# Altium PCB amino.PcbDoc (part 1 of 2)
Units mm, origin at the board's own origin, x right, y up, seen from the top; angles counter-clockwise.
Board outline 13 x 15 mm, 6 copper layers (L1 - SIG, L2 - GND, L3 - SIG, L4 - SIG, L5 - PWR, L6 - SIG), stack 0.739 mm thick; 51 components, 70 nets, 305 pads, 81 vias.
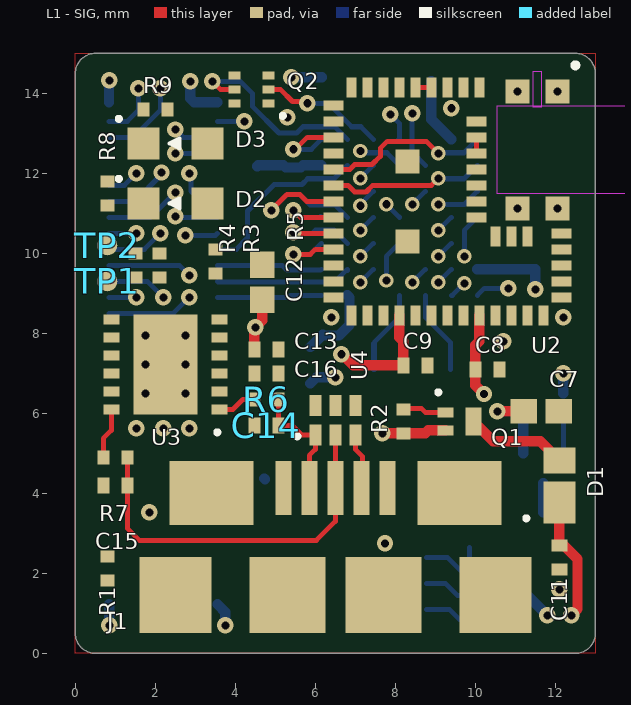
[diagram p0: L1 - SIG view]
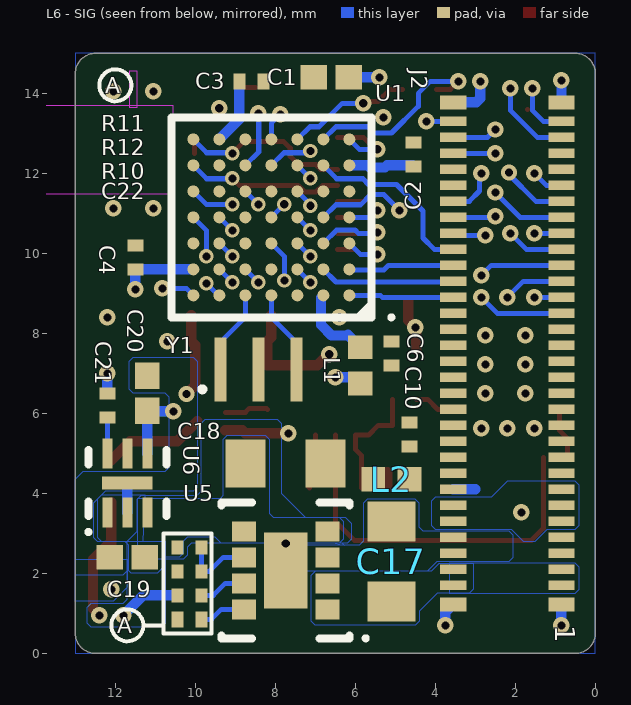
[diagram p1: L6 - SIG view, seen from below]
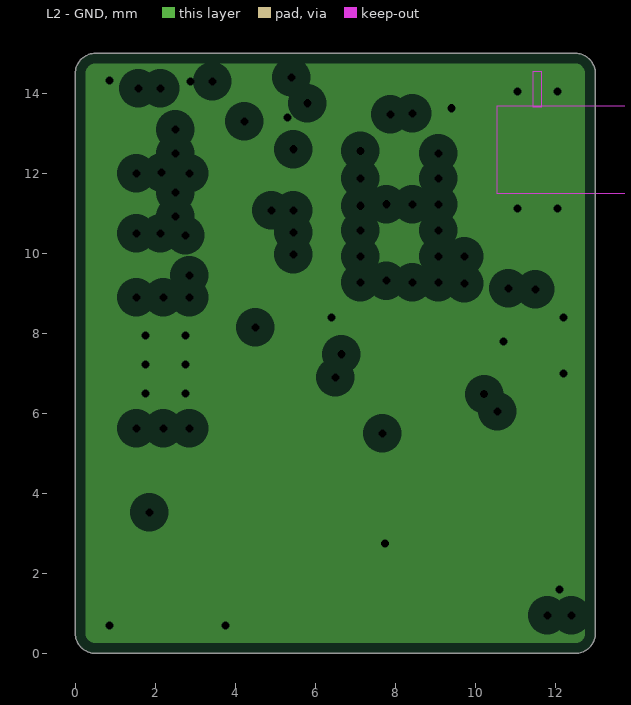
[diagram p2: L2 - GND, clearances drawn from the general rule]
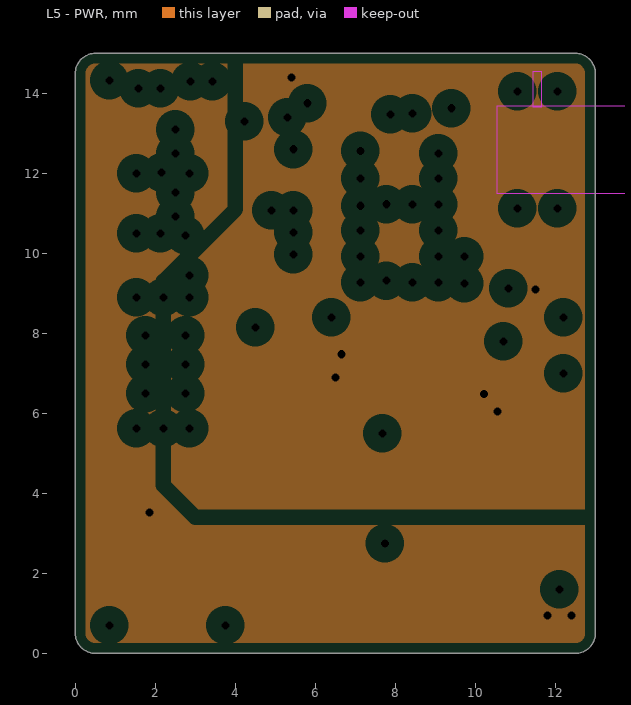
[diagram p3: L5 - PWR, clearances drawn from the general rule]
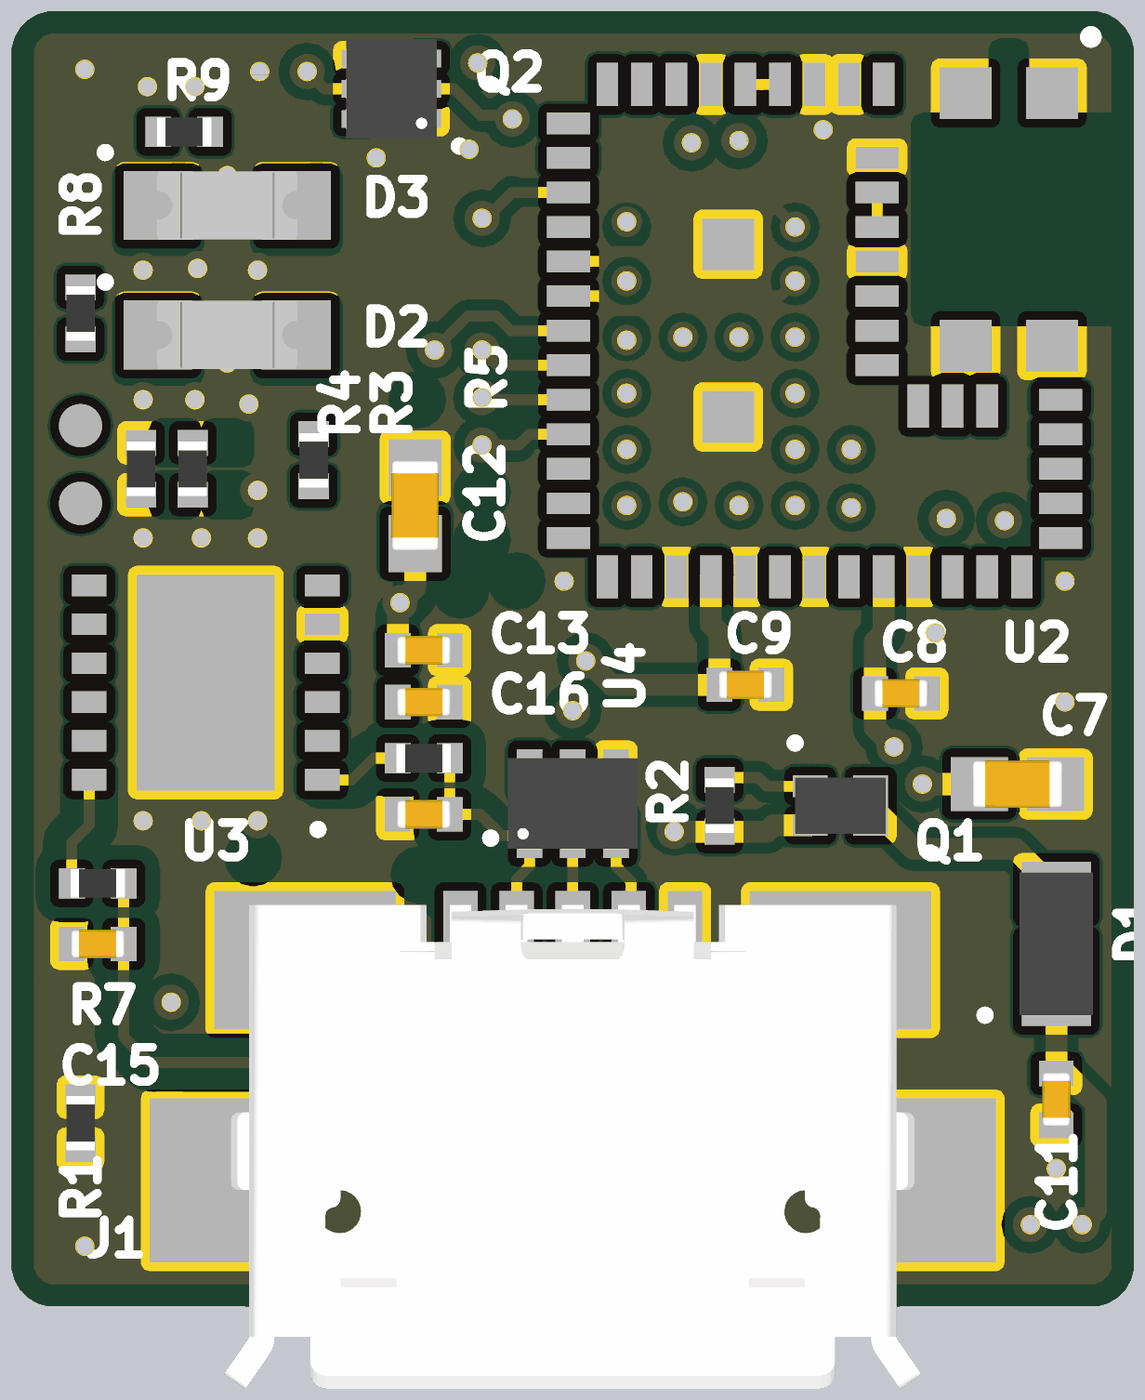
[diagram p4: 3D render of the assembled board from above, using the file's embedded part models]
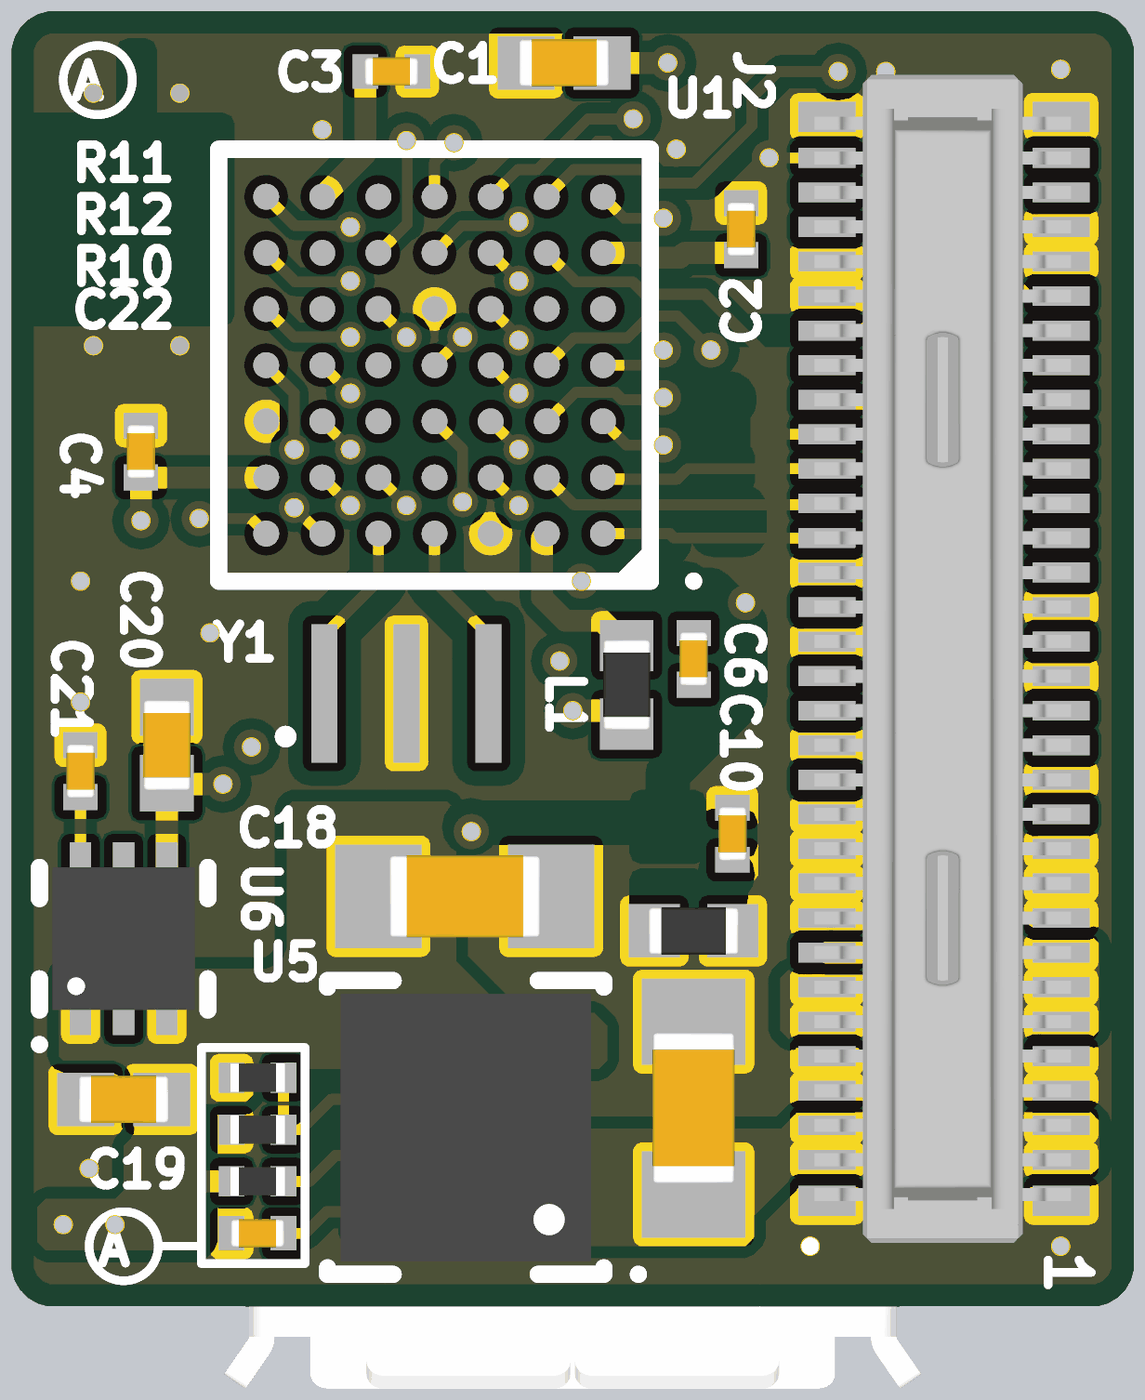
[diagram p5: 3D render of the assembled board from below, using the file's embedded part models]

## Layer stack, top to bottom
Top Solder: solder mask 0.0127, Solder Resist, Dk 3.5
L1 - SIG: signal copper 0.0356
Dielectric: core 0.0889, FR-4, Dk 4.15
L2 - GND: plane copper 0.0178, net GND
Dielectric: core 0.1016, FR-4, Dk 4.15
L3 - SIG: signal copper 0.0178
Dielectric: core 0.2159, FR-4, Dk 4.15
L4 - SIG: signal copper 0.0178
Dielectric: core 0.1016, FR-4, Dk 4.15
L5 - PWR: plane copper 0.0178, net (Multiple Nets)
Dielectric: core 0.0889, FR-4, Dk 4.15
L6 - SIG: signal copper 0.0356
Bottom Solder: solder mask 0.0127, Solder Resist, Dk 3.5

## Board outline
0,14.5 cw(c0.5,14.5) 0.5,15 12.5,15 cw(c12.5,14.5) 13,14.5 13,0.5 cw(c12.5,0.5) 12.5,0 0.5,0 cw(c0.5,0.5) 0,0.5

## Design rules (kind name [scope] priority, off if disabled: settings)
AcuteAngle [All] p1: minimum=6.00000000000000E+0001 checktracksonly=TRUE
BoardOutlineClearance [All] p1: gap=0.254 ignorepadtopadclearanceinfootprint=FALSE
Clearance BGA_1 [WithinRoom('BGA')] p1: gap=0.102 ignorepadtopadclearanceinfootprint=FALSE
Clearance "USB 3H" [InDifferentialPairClass('USB') And Not InComponent('J1', 'J2', 'U3', 'U4') And Not WithinRoom('BGA')] p2: gap=0.267 ignorepadtopadclearanceinfootprint=FALSE
Clearance "Clocks 3H" [InNetClass('Clocks') And Not InComponent('J2', 'U2') And Not WithinRoom('BGA')] p3: gap=0.267 ignorepadtopadclearanceinfootprint=FALSE
Clearance "JTAG 3H Inners" [InNetClass('JTAG') And OnMid] p4: gap=0.305 ignorepadtopadclearanceinfootprint=FALSE
Clearance "JTAG 3H Outers" [InNetClass('JTAG') And OnOutside And Not InComponent('J2', 'U2') And Not WithinRoom('BGA')] p5: gap=0.267 ignorepadtopadclearanceinfootprint=FALSE
Clearance "Default Clearance" [All] p6: gap=0.127 ignorepadtopadclearanceinfootprint=FALSE
ComponentClearance Testpoints [InComponentClass('Testpoints')] p1: gap=0.127 collisioncheckmode=3 verticalgap=0.127 showdistances=FALSE
ComponentClearance "Chip to Chip" [InComponentClass('Chip') vs InComponentClass('Chip')] p2: gap=0.254 collisioncheckmode=3 verticalgap=0.127 showdistances=FALSE
ComponentClearance "All Others" [All] p3: gap=0.635 collisioncheckmode=3 verticalgap=0.127 showdistances=FALSE
DiffPairsRouting USB [InDifferentialPairClass('USB')] p1: maxlimit=0.152 minlimit=0.152 mostfreqgap=0.152 toplayer_minwidth=0.127 toplayer_maxwidth=0.127 toplayer_prefwidth=0.127 midlayer1_minwidth=0.127 midlayer1_maxwidth=0.127 midlayer1_prefwidth=0.127 midlayer2_minwidth=0.127 midlayer2_maxwidth=0.127 midlayer2_prefwidth=0.127 bottomlayer_minwidth=0.127 bottomlayer_maxwidth=0.127 bottomlayer_prefwidth=0.127 maxuncoupledlength=12.7
Height "Bottom Max Height" [OnBottom] p1: minheight=0 maxheight=2 prefheight=1.5
Height "Top Max Height" [OnTop] p2: minheight=0 maxheight=3 prefheight=1
HoleToHoleClearance [All] p1: gap=0.127 allowstackedmicrovias=TRUE
Length "Clocks 19mm" [InNetClass('Clocks')] p1: maxlimit=19 minlimit=0
Length "JTAG 100mm" [InNetClass('JTAG')] p2: maxlimit=100 minlimit=0
MatchedLengths "Clocks 0.127mm" [InNetClass('Clocks')] p1: tolerance=0.127 checknetsindiffpair=FALSE checkdiffpairvsdiffpair=TRUE checkxsignals=TRUE checkothers=TRUE
MatchedLengths "USB 3.81mm" [InDifferentialPairClass('USB')] p2: tolerance=3.81 checknetsindiffpair=TRUE checkdiffpairvsdiffpair=FALSE checkxsignals=FALSE checkothers=FALSE
MaxMinImpedance "90ohm DIFF" [InDifferentialPairClass('USB')] p1: minimum=81.00 maximum=99.00
MaxMinImpedance "50ohm SE" [InNetClass('Clocks', 'JTAG')] p2: minimum=45.00 maximum=55.00
MaximumViaCount "USB 1 Via" [InDifferentialPairClass('USB')] p1: limit=1
MinimumAnnularRing "BGA AR" [WithinRoom('BGA')] p1: minimumring=0.076
MinimumAnnularRing [All] p2: minimumring=0.102
MinimumSolderMaskSliver [All] p1: minsoldermaskwidth=0.001
PlaneClearance [All] p1: clearance=0.381
PlaneConnect [All] p1: planeconnectstyle=Direct reliefexpansion=0.508 reliefentries=4 reliefconductorwidth=0.254 reliefairgap=0.254
PolygonConnect [All] p1: connectstyle=Direct reliefconductorwidth=0.254 reliefentries=4 polygonreliefangle="90 Angle" airgapwidth=0.254
RoomDefinition BGA [All] p1: confinementstyle=ConfineOut formatcopy=TRUE lockcomponents=FALSE outline 5.75,13.25 10.5,13.25 10.5,8.5 5.75,8.5
RoutingCorners [All] p1: cornerstyle=45-Degree minsetback=0.254 maxsetback=0.254
RoutingLayers "Clocks and USB" [InNetClass('Clocks','USB')] p1: top layer_v5=TRUE mid layer 1_v5=FALSE mid layer 2_v5=FALSE bottom layer_v5=TRUE
RoutingLayers "Default Routing" [All] p2: top layer_v5=TRUE mid layer 1_v5=TRUE mid layer 2_v5=TRUE bottom layer_v5=TRUE
RoutingVias [All] p1: holewidth=0.203 width=0.457 viastyle="Through Hole" minholewidth=0.203 minwidth=0.406 maxholewidth=100 maxwidth=200
SMDEntry [All] p1: side=TRUE corner=TRUE anyangle=TRUE
SilkToSilkClearance [All] p1: silktosilkclearance=0.127
SilkToSolderMaskClearance [IsPad] p1: minsilkscreentomaskgap=0.127 clearancetoexposedcopper=TRUE
SolderMaskExpansion [All] p1: expansion=0.102
ViasUnderSMD [All] p1: allowed=FALSE
Width "Teensy Power" [InNetClass('Teensy Power')] p1: maxlimit=100 minlimit=0.254 preferedwidth=0.254
Width "Low Power" [InNetClass('Low Power')] p2: maxlimit=100 minlimit=0.254 preferedwidth=0.635
Width "Medium Power" [InNetClass('Medium Power')] p3: maxlimit=100 minlimit=0.254 preferedwidth=1.778
Width "High Power" [InNetClass('High Power')] p4: maxlimit=100 minlimit=0.254 preferedwidth=4.064
Width "Clocks 50ohm" [InNetClass('Clocks')] p5: maxlimit=0.13 minlimit=0.082 preferedwidth=0.11 toplayer_maxwidth=0.127 toplayer_prefwidth=0.103 midlayer1_minwidth=0.093 midlayer2_minwidth=0.093 bottomlayer_maxwidth=0.127 bottomlayer_prefwidth=0.103 impedancedriven=TRUE minimp=45.000000 maximp=55.000000 favimp=50.000000
Width "JTAG 50ohm" [InNetClass('JTAG')] p6: maxlimit=0.13 minlimit=0.082 preferedwidth=0.11 toplayer_maxwidth=0.127 toplayer_prefwidth=0.103 midlayer1_minwidth=0.093 midlayer2_minwidth=0.093 bottomlayer_maxwidth=0.127 bottomlayer_prefwidth=0.103 impedancedriven=TRUE minimp=45.000000 maximp=55.000000 favimp=50.000000
Width "Default Width" [All] p7: maxlimit=100 minlimit=0.127 preferedwidth=0.203
19 further rules are at their usual default settings.

## Classes and differential pairs
component class Testpoints: TP1 TP2
component class Chip: C1 C2 C3 C4 C6 C7 C8 C9 C10 C11 C12 C13 C14 C15 C16 C17 C18 C19 C20 C21 C22 D2 D3 L1 L2 R1 R2 R3 R4 R5 R6 R7 R8 R9 R10 R11 R12
differential pair class USB: MCU_D USB_D USB_DR
net class "Teensy Power": AVCC VCCIO
net class "Low Power": 3V3 5V0_USB VBUS
net class "Medium Power": 12V0
net class "High Power": 5V0 GND
net class Clocks: HFXO XTALI XTALO
net class USB: MCU_D_N MCU_D_P USB_D_N USB_D_P USB_DR_N USB_DR_P
net class JTAG: BT_SWCLK BT_SWDIO BT_SWO PDI_CLK PDI_DATA
differential pair USB_D: +USB_D_P -USB_D_N
differential pair USB_DR: +USB_DR_P -USB_DR_N
differential pair MCU_D: +MCU_D_P -MCU_D_N

## Components (designator, comment, footprint, x,y, rotation, side; value= is the part's Value field where it differs from the comment)
C1 "10uF" C0402 6.6,14.4 r180 bottom
C2 "0.1uF" C0201 4.55,12.475 r270 bottom
C3 "0.1uF" C0201 8.6,14.3 r0 bottom
C4 "0.1uF" C0201 11.5,9.9 r270 bottom
C6 "0.1uF" C0201 5.1,7.5 r90 bottom
C7 "10uF" C0402 11.65,6.05 r180 top
C8 "0.1uF" C0201 10.3,7.1 r180 top
C9 "0.1uF" C0201 8.5,7.2 r180 top
C10 "0.1uF" C0201 4.65,5.475 r270 bottom
C11 "0.1uF" C0201 12.1,2.4 r90 top
C12 "4.7uF" C0402 4.675,9.275 r270 top
C13 "0.1uF" C0201 4.775,7.6 r180 top
C14 "47pF" C0201 4.775,5.7 r0 top
C15 "47pF" C0201 1,4.2 r0 top
C16 "0.1uF" C0201 4.775,7 r180 top
C17 "10uF" C0603 5.1,2.3 r270 bottom
C18 "22uF" C0603 7.75,4.75 r0 bottom
C19 "1uF" C0402 11.7,2.4 r180 bottom
C20 "1uF" C0402 11.2,6.5 r270 bottom
C21 "0.1uF" C0201 12.2,6.2 r270 bottom
C22 "3300pF" C0201 10.15,0.85 r180 bottom
D1 "PMEG2020EPK,315" NXP_DFN1608D-2 12.1,4.2 r90 top
D2 "5988091107F" LED0603 2.5,11.25 r0 top
D3 "5988070107F" LED0603 2.5,12.75 r0 top
J1 "ZX62-B-5PA(33)" HRS_MICRO_USB 6.5,2.8 r0 top locked
J2 "DF40C-60DP-0.4V(51)" HRS_DF40C_60P_PLG 2.2,7.5 r90 bottom locked
L1 "BLM15PX601SN1D" L0402 5.875,7.2 r90 bottom
L2 "BLM15PX601SN1D" L0402 5.1,4.35 r0 bottom
Q1 "DMP21D0UFB4-7B" DIO_X2-DFN1006-3 9.6,5.8 r0 top
Q2 "PMDXB600UNE" NXP_DFN1010B-6 4.4,14.1 r180 top
R1 "10k" R0201 0.8,2.125 r270 top
R2 "100k" R0201 8.2,5.8 r270 top
R3 "10k" R0201 2.1,9.7 r90 top
R4 "10k" R0201 1.5,9.7 r90 top
R5 "1k" R0201 3.5,9.8 r270 top
R6 "27" R0201 4.775,6.35 r180 top
R7 "27" R0201 1,4.9 r180 top
R8 "560R" R0201 0.8,11.5 r90 top
R9 "1k" R0201 2,13.6 r180 top
R10 "100k" R0201 10.15,1.45 r0 bottom
R11 "523k" R0201 10.15,2.65 r0 bottom
R12 "100k" R0201 10.15,2.05 r180 bottom
TP1 "TP SMT 0.5MM" TP_SMT_0.5MM 0.8,9.3 r90 top
TP2 "TP SMT 0.5MM" TP_SMT_0.5MM 0.8,10.2 r90 top
U1 "ATXMEGA64A4U-CU" MCP_49C2 8.1,10.9 r0 bottom locked
U2 "BGM123A256V2R" SIL_BGM123 9.3,11.3 r270 top locked
U3 "FT234XD-R" FTD_DFN12 2.25,7.225 r180 top
U4 "TPD4S012DRYR" TI_DRY 6.5,5.825 r90 top
U5 "TPS82140SILT" TI_USIL8_SIL0008D 7.74,2.075 r0 bottom locked
U6 "MIC5353-3.3YMT-TR" MCP_MLF6_MT 11.7,4.26 r90 bottom
Y1 "CSTCE16M0V53-R0" MUR_CSTCE_V 8.425,7.1 r0 bottom

## Footprints (in the part's own frame and the unit in brackets; to place one, negate y for a bottom-side part, rotate by r counter-clockwise, add the part's x,y. Pads: shape width x height; smd on the part's side, far side on the other; paste and mask are expansions set on the pad)
C0201 [mm] "Chip Capacitor, 2-Leads, Body 0.60x0.30mm, IPC Medium Density"
  rect 0.3x0.4 smd: 1(-0.3,0) 2(0.3,0)
  body extent -0.32,-0.17 0.32,0.17, height 0.33
C0402 [mm] "Chip Capacitor, 2-Leads, Body 1.00x0.50mm, IPC Medium Density"
  rect 0.66x0.62 smd: 1(-0.44,0) 2(0.44,0)
  body extent -0.53,-0.28 0.53,0.28, height 0.55
C0603 [mm] "Chip Capacitor, 2-Leads, Body 1.60x0.80mm, IPC Medium Density"
  rect 1x1.2 smd: 1(-1,0) 2(1,0)
  body extent -0.87,-0.48 0.87,0.48, height 0.95
DIO_X2-DFN1006-3 [mm] "DFN, 3-Leads, Body 0.60x1.00mm, Pitch 0.65mm, IPC Medium Density"
  rect 0.4x0.25 smd: 1(-0.35,0.225) 2(-0.35,-0.225)
  rect 0.4x0.7 smd: 3(0.35,0)
  silkscreen extent -0.57,0.68 -0.48,0.77, body extent -0.53,-0.33 0.53,0.33, height 0.4
FTD_DFN12 [mm] "SON, 12-Leads, Body 3x3mm, Pitch 0.45mm, Thermal Pad 2.5x1.6mm"
  rect 0.4x0.25 smd: 1(-1.35,1.125) 2(-1.35,0.675) 3(-1.35,0.225) 4(-1.35,-0.225) 5(-1.35,-0.675) 6(-1.35,-1.125) 7(1.35,-1.125) 8(1.35,-0.675) 9(1.35,-0.225) 10(1.35,0.225) 11(1.35,0.675) 12(1.35,1.125)
  rect 1.6x2.5 smd mask+0.102: 13(0,0)
  silkscreen extent -1.35,1.65 -1.25,1.75, body extent -1.5,-1.5 1.5,1.5, height 0.9
HRS_DF40C_60P_PLG [mm] "60 Position Connector Plug, Outer Shroud Contacts Surface Mount Gold"
  rect 0.23x0.66 smd: 1(-5.8,-1.355) 2(-5.8,1.355) 3(-5.4,-1.355) 4(-5.4,1.355) 5(-5,-1.355) 6(-5,1.355) 7(-4.6,-1.355) 8(-4.6,1.355) 9(-4.2,-1.355) 10(-4.2,1.355) 11(-3.8,-1.355) 12(-3.8,1.355) 13(-3.4,-1.355) 14(-3.4,1.355) 15(-3,-1.355) 16(-3,1.355) 17(-2.6,-1.355) 18(-2.6,1.355) 19(-2.2,-1.355) 20(-2.2,1.355) 21(-1.8,-1.355) 22(-1.8,1.355) 23(-1.4,-1.355) 24(-1.4,1.355) 25(-1,-1.355) 26(-1,1.355) 27(-0.6,-1.355) 28(-0.6,1.355) 29(-0.2,-1.355) 30(-0.2,1.355) 31(0.2,-1.355) 32(0.2,1.355) 33(0.6,-1.355) 34(0.6,1.355) 35(1,-1.355) 36(1,1.355) 37(1.4,-1.355) 38(1.4,1.355) 39(1.8,-1.355) 40(1.8,1.355) 41(2.2,-1.355) 42(2.2,1.355) 43(2.6,-1.355) 44(2.6,1.355) 45(3,-1.355) 46(3,1.355) 47(3.4,-1.355) 48(3.4,1.355) 49(3.8,-1.355) 50(3.8,1.355) 51(4.2,-1.355) 52(4.2,1.355) 53(4.6,-1.355) 54(4.6,1.355) 55(5,-1.355) 56(5,1.355) 57(5.4,-1.355) 58(5.4,1.355) 59(5.8,-1.355) 60(5.8,1.355)
  rect 0.35x0.66 smd: 61(-6.275,-1.355) 62(-6.275,1.355) 63(6.275,-1.355) 64(6.275,1.355)
  body extent -6.76,-1.47 6.76,1.5, height 1.11
HRS_MICRO_USB [mm] "USB 2.0 Micro B Receptacle Connector 5 Position Surface Mount, Right Angle"
  rect 0.4x1.35 smd: 1(-1.3,1.338) 2(-0.65,1.338) 3(0,1.338) 4(0.65,1.338) 5(1.3,1.338)
  rect 1.8x1.9 smd: 6(-4,-1.338) 6(4,-1.338)
  rect 2.1x1.6 smd: 6(-3.1,1.212) 6(3.1,1.212)
  rect 1.9x1.9 smd: 6(-1.2,-1.338) 6(1.2,-1.338)
  body extent -4.04,-3.75 4.04,1.85, height 2.76
L0402 [mm] "Chip Inductor, 2-Leads, Body 1.00x0.50mm, IPC Medium Density"
  rect 0.59x0.62 smd: 1(-0.455,0) 2(0.455,0)
  body extent -0.53,-0.28 0.53,0.28, height 0.55
LED0603 [mm] "Chip Diode, 2-Leads, Body 1.60x0.80mm, IPC Medium Density"
  rect 0.8x0.8 smd: 1(-0.8,0) 2(0.8,0)
  silkscreen extent -1.46,-0.13 0.1,0.66, body extent -0.81,-0.39 0.81,0.39, height 0.71
MCP_49C2 [mm] "BGA, 49-Leads, Body 5x5mm, Pitch 0.65mm"
  round 0.3 smd: A1(-1.95,1.95) A2(-1.3,1.95) A3(-0.65,1.95) A4(0,1.95) A5(0.65,1.95) A6(1.3,1.95) A7(1.95,1.95) B1(-1.95,1.3) B2(-1.3,1.3) B3(-0.65,1.3) B4(0,1.3) B5(0.65,1.3) B6(1.3,1.3) B7(1.95,1.3) C1(-1.95,0.65) C2(-1.3,0.65) C3(-0.65,0.65) C4(0,0.65) C5(0.65,0.65) C6(1.3,0.65) C7(1.95,0.65) D1(-1.95,0) D2(-1.3,0) D3(-0.65,0) D4(0,0) D5(0.65,0) D6(1.3,0) D7(1.95,0) E1(-1.95,-0.65) E2(-1.3,-0.65) E3(-0.65,-0.65) E4(0,-0.65) E5(0.65,-0.65) E6(1.3,-0.65) E7(1.95,-0.65) F1(-1.95,-1.3) F2(-1.3,-1.3) F3(-0.65,-1.3) F4(0,-1.3) F5(0.65,-1.3) F6(1.3,-1.3) F7(1.95,-1.3) G1(-1.95,-1.95) G2(-1.3,-1.95) G3(-0.65,-1.95) G4(0,-1.95) G5(0.65,-1.95) G6(1.3,-1.95) G7(1.95,-1.95)
  silkscreen extent -3.05,-2.5 2.5,2.55, body extent -2.5,-2.5 2.5,2.5, height 1.05
MCP_MLF6_MT [mm] "SON, 6-Leads, Body 1.60x1.60mm, Pitch 0.50mm, Thermal Pad 1.26x0.33mm, IPC Medium Density"
  rect 0.75x0.25 smd: 1(-0.74,0.5) 2(-0.74,0) 3(-0.74,-0.5) 4(0.74,-0.5) 5(0.74,0) 6(0.74,0.5)
  rect 0.33x1.26 smd: 7(0,0)
  silkscreen extent -1.27,-0.98 0.82,1.02, body extent -0.83,-0.82 0.83,0.82, height 0.6
MUR_CSTCE_V [mm] "3-SMD Ceramic Resonator, 3.2mm x 1.3mm"
  rect 0.3x1.6 smd: 1(0.95,0) 2(0,0) 3(-0.95,0)
  silkscreen extent 1.34,0.44 1.46,0.56, body extent -1.6,-0.65 1.6,0.65, height 1
NXP_DFN1010B-6 [mm] "SON, 6-Leads, Body 1.10x1.00mm, Pitch 0.35mm, IPC Medium Density"
  rect 0.3x0.2 smd: 1(-0.425,0.35) 2(-0.425,0) 3(-0.425,-0.35) 4(0.425,-0.35) 5(0.425,0) 6(0.425,0.35)
  silkscreen extent -0.84,0.61 -0.74,0.71, body extent -0.53,-0.58 0.53,0.58, height 0.4
NXP_DFN1608D-2 [mm] "DFN, 2-Leads, Body 0.80x1.60mm, Custom Pitch, IPC Medium Density"
  rect 1.05x0.8 smd: 1(-0.425,0)
  rect 0.65x0.8 smd: 2(0.625,0)
  silkscreen extent -0.87,0.77 -0.78,0.87, body extent -0.82,-0.42 0.82,0.43, height 0.4
R0201 [mm] "Chip Resistor, 2-Leads, Body 0.60x0.30mm, IPC Medium Density"
  rect 0.3x0.35 smd: 1(-0.3,0) 2(0.3,0)
  body extent -0.32,-0.16 0.32,0.17, height 0.26
SIL_BGM123 [mm] "Blue Gecko Bluetooth SiP Module"
  rect 0.5x0.25 smd: 1(-2.85,0.8) 2(-2.85,0.4) 3(-2.85,0) 4(-2.85,-0.4) 5(-2.85,-0.8) 6(-2.85,-1.2) 7(-2.85,-1.6) 8(-2.85,-2) 9(-2.85,-2.4) 23(2.85,-2.4) 24(2.85,-2) 25(2.85,-1.6) 26(2.85,-1.2) 27(2.85,-0.8) 28(2.85,-0.4) 29(2.85,0) 30(2.85,0.4) 31(2.85,0.8) 32(2.85,1.2) 33(2.85,1.6) 34(2.85,2) 35(2.85,2.4) 41(0.875,2) 42(0.875,1.6) 43(0.875,1.2)
  rect 0.25x0.5 smd: 10(-2.4,-2.85) 11(-2,-2.85) 12(-1.6,-2.85) 13(-1.2,-2.85) 14(-0.8,-2.85) 15(-0.4,-2.85) 16(0,-2.85) 17(0.4,-2.85) 18(0.8,-2.85) 19(1.2,-2.85) 20(1.6,-2.85) 21(2,-2.85) 22(2.4,-2.85) 36(2.4,2.85) 37(2,2.85) 38(1.6,2.85) 39(1.2,2.85) 40(0.8,2.85) 44(0.4,0.725) 45(0,0.725) 46(-0.4,0.725) 47(-0.8,0.725) 48(-1.2,0.725) 49(-1.6,0.725) 50(-2,0.725)
  rect 0.6x0.6 smd: 51(-1,-1) 52(1,-1) 53(-2.75,2.75) 54(-2.75,1.75) 55(0.175,1.75) 56(0.175,2.75)
  Keep-Out Layer region: -3.25,2.35 -2.35,2.35 -2.35,2.15 -3.25,2.15
  Keep-Out Layer region: -2.388,6.25 -0.188,6.25 -0.188,1.25 -2.388,1.25
  silkscreen extent -3.46,3.14 -3.34,3.26, body extent -3.25,-3.25 3.25,3.25, height 1.4
TI_DRY [mm] "SON, 6-Leads, Body 1.45x1.00mm, Pitch 0.50mm, IPC Medium Density"
  rect 0.52x0.3 smd: 1(-0.37,0.5) 2(-0.37,0) 3(-0.37,-0.5) 4(0.37,-0.5) 5(0.37,0) 6(0.37,0.5)
  silkscreen extent -0.45,0.9 -0.35,1, body extent -0.53,-0.75 0.53,0.75, height 0.6
TI_USIL8_SIL0008D [mm] "PSON, 8-Leads, Body 3.00x2.80mm, Pitch 0.65mm, Thermal Pad 1.90x1.08mm, IPC Medium Density"
  rect 0.6x0.5 smd: 1(-1.04,0.975) 2(-1.04,0.325) 3(-1.04,-0.325) 4(-1.04,-0.975) 5(1.04,-0.975) 6(1.04,-0.325) 7(1.04,0.325) 8(1.04,0.975)
  rect 1.08x1.9 smd: 9(0,0)
  silkscreen extent -2.05,-1.7 1.6,1.75, body extent -1.45,-1.55 1.45,1.55, height 1.53
TP_SMT_0.5MM [mm] "0.5mm SMT Testpoint"
  round 0.5 smd: 1(0,0)

## Part data
C1 C7: library part "10uF 10V 0402", "CAP CER 10UF 10V X5R 0402", Case/Package=0402, Case Code (Metric)=1005, Dielectric=X5R, Manufacturer=Samsung, Manufacturer Part Number=CL05A106MP5NUNC, Max Operating Temperature=85°C, Min Operating Temperature=-55°C, Package Quantity=1, Supplier Part Number 1=1276-1450-1-ND, Tolerance=20%, Voltage Rating=10V, Capacitance=10uF, Case Code (Imperial)=0402, ComponentLink1Description=https://datasheet.ciiva.com/25721/cl05a106mp5nunc-25721584.pdf, ComponentLink1URL=https://datasheet.ciiva.com/25721/cl05a106mp5nunc-25721584.pdf, ComponentLink2Description=https://datasheet.ciiva.com/26838/getdatasheetpartid-745310-26838170.pdf, ComponentLink2URL=https://datasheet.ciiva.com/26838/getdatasheetpartid-745310-26838170.pdf, Contact Plating=Nickel,Tin, Depth=0.5mm, Lead Free="Lead Free", Length=1mm, Mount="Surface Mount", Packaging="Tape and Reel", Pricing 1="1=0.4, 10=0.277, 100=0.1663, 500=0.1247, 1000=0.1053, 2500=0.0998, 5000=0.0943 (USD)", Radiation Hardening=No, Stock 1=2282441, Supplier 1=Digi-Key, Termination=Wraparound, Thickness=0.028inch, Width=0.02inch
C2 C3 C4 C6 C8 C9 C10 C11 C13 C16 C21: library part "0.1uF 16V 0201", "CAP CER 0.1UF 16V X5R 0201", Capacitance=1E-07f, Case/Package=0201, Case Code (Metric)=0603, Dielectric=X5R, Manufacturer=Murata, Manufacturer Part Number=GRM033R61C104ME84D, Max Operating Temperature=85°C, Min Operating Temperature=-55°C, Package Quantity=15000, Supplier Part Number 1=490-9986-1-ND, Tolerance=20%, Voltage Rating=16V, Case Code (Imperial)=0201, ComponentLink1Description=http://www.mouser.com/ds/2/281/c02e-2905.pdf, ComponentLink1URL=http://www.mouser.com/ds/2/281/c02e-2905.pdf, Height=0.3mm, Length=0.024inch, Packaging="Tape and Reel", Pricing 1="1=0.1, 10=0.029, 100=0.013, 500=0.0093, 1000=0.0073, 2500=0.0067, 5000=0.0061 (USD)", Stock 1=660567, Supplier 1=Digi-Key, Termination=SMD/SMT, Thickness=0.013inch, Voltage Rating (DC)=16V, Weight=1.2E-05oz, Width=0.3mm
C12: library part "4.7uF 16V 0402", "CAP CER 4.7UF 16V X5R 0402", Case/Package=0402, Case Code (Metric)=1005, Dielectric=X5R, Manufacturer=Samsung, Manufacturer Part Number=CL05A475MO5NUNC, Max Operating Temperature=85°C, Min Operating Temperature=-55°C, Supplier Part Number 1=1276-6836-1-ND, Tolerance=20%, Voltage Rating=16V, Capacitance=4.7uF, Case Code (Imperial)=0402, Length=0.039inch, Packaging="Tape and Reel", Pricing 1="1=0.36, 10=0.248, 100=0.1485, 500=0.1114, 1000=0.0941, 2500=0.0891, 5000=0.0842 (USD)", Stock 1=282710, Supplier 1=Digi-Key, Thickness=0.022inch, Width=0.02inch
C14 C15: library part "47pF 25V 0201", "CAP CER 47PF 25V C0G/NP0 0201", Case/Package=0201, Case Code (Metric)=0603, Manufacturer=Murata, Manufacturer Part Number=GRM0335C1E470FA01D, Max Operating Temperature=125°C, Min Operating Temperature=-55°C, Package Quantity=15000, Supplier Part Number 1=490-11298-1-ND, Tolerance=1%, Voltage Rating=25V, Capacitance=47pF, Case Code (Imperial)=0201, ComponentLink1Description=https://datasheet.ciiva.com/29538/partnumbering-e-01-29538333.pdf, ComponentLink1URL=https://datasheet.ciiva.com/29538/partnumbering-e-01-29538333.pdf, Length=0.024inch, Packaging="Tape and Reel", Pricing 1="1=0.1, 10=0.019, 100=0.0087, 500=0.0062, 1000=0.0049, 2500=0.0044, 5000=0.0041 (USD)", Stock 1=97008, Supplier 1=Digi-Key, Termination=SMD/SMT, Thickness=0.013inch, Voltage Rating (DC)=25V, Width=0.012inch
C17: library part "10uF 25V 0603", "CAP CER 10UF 25V X5R 0603", Case/Package=0603, Case Code (Metric)=1608, Dielectric=X5R, Manufacturer=Murata, Manufacturer Part Number=GRM188R61E106MA73D, Max Operating Temperature=85°C, Min Operating Temperature=-55°C, Package Quantity=1, Supplier Part Number 1=490-7202-1-ND, Tolerance=20%, Voltage=25V, Capacitance=10uF, Case Code (Imperial)=0603, ComponentLink1Description=https://datasheet.ciiva.com/22619/c02e-22619674.pdf, ComponentLink1URL=https://datasheet.ciiva.com/22619/c02e-22619674.pdf, ComponentLink2Description=https://datasheet.ciiva.com/22776/608985-22776426.pdf, ComponentLink2URL=https://datasheet.ciiva.com/22776/608985-22776426.pdf, ComponentLink3Description=https://datasheet.ciiva.com/22776/c02e-22776427.pdf, ComponentLink3URL=https://datasheet.ciiva.com/22776/c02e-22776427.pdf, ComponentLink4Description=https://datasheet.ciiva.com/14906/partnumbering-e-01-14906429.pdf, ComponentLink4URL=https://datasheet.ciiva.com/14906/partnumbering-e-01-14906429.pdf, ComponentLink5Description=https://datasheet.ciiva.com/14906/partnumbering-e-01-14906431.pdf, ComponentLink5URL=https://datasheet.ciiva.com/14906/partnumbering-e-01-14906431.pdf, Composition=Ceramic, Depth=0.8mm, Height=0.8mm, Lead Free="Lead Free", Length=1.6mm, Mount="Surface Mount", Number of Pins=2, Packaging="Tape and Reel", Pricing 1="1=0.41, 10=0.285, 100=0.1708, 500=0.1281, 1000=0.1082 (USD)", REACH SVHC="No SVHC", Stock 1=1088965, Supplier 1=Digi-Key, Termination=SMD/SMT, Thickness=0.031inch, Voltage Rating=25V, Voltage Rating (DC)=25V, Weight=0.000222oz, Width=0.031inch
C18: library part "22uF 16V 0603", "CAP CER 22UF 16V X5R 0603", Manufacturer=Samsung, Manufacturer Part Number=CL10A226MO7JZNC, Supplier Part Number 1=1276-7076-1-ND, Stock 1=0, Supplier 1=Digi-Key
C19 C20: library part "1uF 25V 0402", "CAP CER 1UF 25V X5R 0402", Case/Package=0402, Case Code (Metric)=1005, Dielectric=X5R, Manufacturer="Taiyo Yuden", Manufacturer Part Number=TMK105BJ105MV-F, Max Operating Temperature=85°C, Min Operating Temperature=-55°C, Package Quantity=1, Supplier Part Number 1=587-3245-1-ND, Tolerance=20%, Voltage Rating=25V, Capacitance=1uF, Case Code (Imperial)=0402, ComponentLink1Description=https://datasheet.ciiva.com/11596/tmk105bj105mv-f-ss-11596466.pdf, ComponentLink1URL=https://datasheet.ciiva.com/11596/tmk105bj105mv-f-ss-11596466.pdf, ComponentLink2Description=https://datasheet.ciiva.com/15922/tmk105bj105mv-f-pdf-15922317.pdf, ComponentLink2URL=https://datasheet.ciiva.com/15922/tmk105bj105mv-f-pdf-15922317.pdf, ComponentLink3Description=https://datasheet.ciiva.com/13404/mlcc-all-e-541559-13404206.pdf, ComponentLink3URL=https://datasheet.ciiva.com/13404/mlcc-all-e-541559-13404206.pdf, ComponentLink4Description=https://datasheet.ciiva.com/30154/128tmk105bj105mv-f-30154639.pdf, ComponentLink4URL=https://datasheet.ciiva.com/30154/128tmk105bj105mv-f-30154639.pdf, Composition=Ceramic, Depth=0.5mm, Halogen Free="Halogen Free", Height=0.5mm, Length=1mm, Mount="Surface Mount", Packaging="Tape and Reel", Pricing 1="1=0.2, 10=0.14, 100=0.066, 500=0.0463, 1000=0.0383, 2500=0.0357, 5000=0.0326 (USD)", Radiation Hardening=No, Stock 1=113342, Supplier 1=Digi-Key, Termination=SMD/SMT, Thickness=0.022inch, Voltage Rating (DC)=25V, Width=0.02inch
C22: library part "3300pF 16V 0201", "CAP CER 3300PF 16V X7R 0201", Capacitance=3.3nF, Case/Package=0201, Case Code (Metric)=0603, Dielectric=X7R, Manufacturer=Murata, Manufacturer Part Number=GRM033R71C332KA88D, Max Operating Temperature=125°C, Min Operating Temperature=-55°C, Package Quantity=1, Supplier Part Number 1=490-3191-1-ND, Tolerance=10%, Voltage Rating=16V, Case Code (Imperial)=0201, ComponentLink1Description=https://datasheet.ciiva.com/11620/product-11620449.pdf, ComponentLink1URL=https://datasheet.ciiva.com/11620/product-11620449.pdf, ComponentLink2Description=https://datasheet.ciiva.com/129/grm033r71c332ka88-01-129900.pdf, ComponentLink2URL=https://datasheet.ciiva.com/129/grm033r71c332ka88-01-129900.pdf, ComponentLink3Description=https://datasheet.ciiva.com/129/grm033r71c332ka88-01-129901.pdf, ComponentLink3URL=https://datasheet.ciiva.com/129/grm033r71c332ka88-01-129901.pdf, ComponentLink4Description=https://datasheet.ciiva.com/18184/getdatasheetpartid-467171-18184093.pdf, ComponentLink4URL=https://datasheet.ciiva.com/18184/getdatasheetpartid-467171-18184093.pdf, ComponentLink5Description=https://datasheet.ciiva.com/129/grm033r71c332ka88-01-129902.pdf, ComponentLink5URL=https://datasheet.ciiva.com/129/grm033r71c332ka88-01-129902.pdf, ComponentLink6Description=https://datasheet.ciiva.com/29199/455779-da-01-en-vs-kondensator-0201-29199166.pdf, ComponentLink6URL=https://datasheet.ciiva.com/29199/455779-da-01-en-vs-kondensator-0201-29199166.pdf, Depth=0.3mm, Height=0.3mm, Lead Free="Lead Free", Length=0.6mm, Material=Ceramic, Mount="Surface Mount", Packaging="Tape and Reel", Pricing 1="1=0.1, 10=0.029, 100=0.013, 500=0.0093, 1000=0.0073, 2500=0.0067, 5000=0.0061 (USD)", Radiation Hardening=No, Stock 1=49387, Supplier 1=Digi-Key, Termination=SMD/SMT, Thickness=0.013inch, Voltage Rating (DC)=16V, Width=0.012inch
D1: "DIODE SCHOTTKY 20V 2A 2DFN", Average Rectified Current=2A, Case/Package=SMD/SMT, Forward Voltage=395mV, Manufacturer="NXP Semiconductors", Max Forward Surge Current (Ifsm)=5A, Max Operating Temperature=150°C, Max Power Dissipation=1.565W, Max Repetitive Reverse Voltage (Vrrm)=20V, Min Operating Temperature=-55°C, Natural Thermal Resistance=20°C/W, Package Quantity=8000, Peak Reverse Current=70uA, Supplier Part Number 1=1727-1338-1-ND, ComponentLink1Description=https://datasheet.ciiva.com/29592/pmeg2020epk-29592900.pdf, ComponentLink1URL=https://datasheet.ciiva.com/29592/pmeg2020epk-29592900.pdf, ComponentLink2Description=https://datasheet.ciiva.com/29592/pmeg2020epk-29592901.pdf, ComponentLink2URL=https://datasheet.ciiva.com/29592/pmeg2020epk-29592901.pdf, ComponentLink3Description=https://datasheet.ciiva.com/24111/pmeg2020epk-268880-24111063.pdf, ComponentLink3URL=https://datasheet.ciiva.com/24111/pmeg2020epk-268880-24111063.pdf, ComponentLink4Description=https://datasheet.ciiva.com/25648/pmeg2020epk-25648600.pdf, ComponentLink4URL=https://datasheet.ciiva.com/25648/pmeg2020epk-25648600.pdf, Element Configuration=Single, Forward Current=2A, Manufacturer Part Number=PMEG2020EPK,315, Mount="Surface Mount", Number of Pins=2, Packaging="Tape and Reel", Peak Non-Repetitive Surge Current=5A, Pricing 1="1=0.51, 10=0.387, 100=0.2411, 500=0.165, 1000=0.1269 (USD)", Radiation Hardening=No, Reverse Recovery Time=5ns, Reverse Voltage (DC)=20V, Stock 1=146420, Supplier 1=Digi-Key
D2: library part "Blue 0603 LED", "LED BLUE CLEAR 0603 SMD", Case/Package=0603, Case Code (Metric)=1608, Colour=Blue, Forward Current=20mA, Forward Voltage=3.2V, Lens Colour=Clear,Colorless, Manufacturer=Dialight, Manufacturer Part Number=598-8091-107F, Max Operating Temperature=100°C, Min Operating Temperature=-30°C, Package Quantity=4000, Power Dissipation=70mW, Supplier Part Number 1=350-2037-1-ND, Case Code (Imperial)=0603, ComponentLink1Description=https://datasheet.ciiva.com/15118/getdatasheetpartid-194139-15118048.pdf, ComponentLink1URL=https://datasheet.ciiva.com/15118/getdatasheetpartid-194139-15118048.pdf, ComponentLink2Description=https://datasheet.ciiva.com/2111/598-series-0603-pkg-2111556.pdf, ComponentLink2URL=https://datasheet.ciiva.com/2111/598-series-0603-pkg-2111556.pdf, ComponentLink3Description=https://datasheet.ciiva.com/2111/598-series-0603-pkg-2111557.pdf, ComponentLink3URL=https://datasheet.ciiva.com/2111/598-series-0603-pkg-2111557.pdf, ComponentLink4Description=https://datasheet.ciiva.com/15965/mdei5980603-15965445.pdf, ComponentLink4URL=https://datasheet.ciiva.com/15965/mdei5980603-15965445.pdf, ComponentLink5Description=https://datasheet.ciiva.com/30240/mdei5980603-30240533.pdf, ComponentLink5URL=https://datasheet.ciiva.com/30240/mdei5980603-30240533.pdf, ComponentLink6Description=https://datasheet.ciiva.com/2111/598-series-0603-pkg-2111558.pdf, ComponentLink6URL=https://datasheet.ciiva.com/2111/598-series-0603-pkg-2111558.pdf, ComponentLink7Description=https://datasheet.ciiva.com/7970/25658-7970182.pdf, ComponentLink7URL=https://datasheet.ciiva.com/7970/25658-7970182.pdf, ComponentLink8Description=https://datasheet.ciiva.com/14603/70081992-14603963.pdf, ComponentLink8URL=https://datasheet.ciiva.com/14603/70081992-14603963.pdf, ComponentLink9Description=https://datasheet.ciiva.com/16400/smt-selector-guide-16400478.pdf, ComponentLink9URL=https://datasheet.ciiva.com/16400/smt-selector-guide-16400478.pdf, Depth=0.8mm, Dominant Wavelength=470nm, Height=0.7mm, Illumination Colour=Blue, Lead Free="Lead Free", Length=1.6mm, Lens Style=Clear,Diffused,Colorless,Rectangular, Lens Transparency=Clear, Luminous Intensity=140mcd, Mount="Surface Mount", Number of Elements=1, Number of LEDs=1, Number of Pins=2, Packaging="Tape and Reel", Pricing 1="1=0.75, 10=0.583, 25=0.4864, 100=0.4189, 250=0.374, 500=0.3216, 1000=0.2483 (USD)", Radiation Hardening=No, REACH SVHC="No SVHC", Stock 1=42042, Supplier 1=Digi-Key, Test Current=20mA, Viewing Angle=140°, Wavelength=475nm, Width=0.8mm
D3: library part "Green 0603 LED", "LED GREEN CLEAR 0603 SMD", Case/Package=0603, Case Code (Metric)=1608, Colour=Green, Forward Current=20mA, Forward Voltage=2V, Lens Colour=Clear, Manufacturer=Dialight, Manufacturer Part Number=598-8070-107F, Max Operating Temperature=100°C, Min Operating Temperature=-30°C, Package Quantity=4000, Power Dissipation=60mW, Supplier Part Number 1=350-2035-1-ND, Case Code (Imperial)=0603, ComponentLink1Description=https://datasheet.ciiva.com/4688/598-selectorguide-18902-4688880.pdf, ComponentLink1URL=https://datasheet.ciiva.com/4688/598-selectorguide-18902-4688880.pdf, ComponentLink2Description=https://datasheet.ciiva.com/11774/0900766b80ae2975-11774257.pdf, ComponentLink2URL=https://datasheet.ciiva.com/11774/0900766b80ae2975-11774257.pdf, ComponentLink3Description=https://datasheet.ciiva.com/1243/1484480-1243893.pdf, ComponentLink3URL=https://datasheet.ciiva.com/1243/1484480-1243893.pdf, ComponentLink4Description=https://datasheet.ciiva.com/2110/598-series-0603-pkg-2110165.pdf, ComponentLink4URL=https://datasheet.ciiva.com/2110/598-series-0603-pkg-2110165.pdf, ComponentLink5Description=https://datasheet.ciiva.com/1243/1484480-1243894.pdf, ComponentLink5URL=https://datasheet.ciiva.com/1243/1484480-1243894.pdf, ComponentLink6Description=https://datasheet.ciiva.com/2110/598-series-0603-pkg-2110166.pdf, ComponentLink6URL=https://datasheet.ciiva.com/2110/598-series-0603-pkg-2110166.pdf, ComponentLink7Description=https://datasheet.ciiva.com/2110/598-series-0603-pkg-2110167.pdf, ComponentLink7URL=https://datasheet.ciiva.com/2110/598-series-0603-pkg-2110167.pdf, ComponentLink8Description=https://datasheet.ciiva.com/14605/70081990-14605530.pdf, ComponentLink8URL=https://datasheet.ciiva.com/14605/70081990-14605530.pdf, ComponentLink9Description=https://datasheet.ciiva.com/15965/mdei5980603-15965419.pdf, ComponentLink9URL=https://datasheet.ciiva.com/15965/mdei5980603-15965419.pdf, ComponentLink10Description=https://datasheet.ciiva.com/30188/mdei5980603-30188139.pdf, ComponentLink10URL=https://datasheet.ciiva.com/30188/mdei5980603-30188139.pdf, ComponentLink11Description=https://datasheet.ciiva.com/15117/getdatasheetpartid-146438-15117836.pdf, ComponentLink11URL=https://datasheet.ciiva.com/15117/getdatasheetpartid-146438-15117836.pdf, ComponentLink12Description=https://datasheet.ciiva.com/22749/1484480-22749228.pdf, ComponentLink12URL=https://datasheet.ciiva.com/22749/1484480-22749228.pdf, ComponentLink13Description=https://datasheet.ciiva.com/16400/smt-selector-guide-16400463.pdf, ComponentLink13URL=https://datasheet.ciiva.com/16400/smt-selector-guide-16400463.pdf, Depth=0.8mm, Dominant Wavelength=568nm, Height=0.7mm, Illumination Colour=Green, Lead Free="Lead Free", Length=1.6mm, Lens Style=Clear,Diffused,Colorless,Rectangular, Luminous Intensity=20mcd, Mount="Surface Mount", Number of Elements=1, Number of LEDs=1, Number of Pins=2, Packaging="Tape and Reel", Pricing 1="1=0.45, 10=0.327, 25=0.2504, 100=0.1634, 250=0.1198, 500=0.1016, 1000=0.0835 (USD)", Radiation Hardening=No, REACH SVHC="No SVHC", Stock 1=147636, Supplier 1=Digi-Key, Test Current=20mA, Viewing Angle=140°, Wavelength=570nm, Width=0.8mm
J1: library part "USB Micro B", "CONN RCPT USB MICRO B SMD R/A", Current Rating=1.8A, Manufacturer=Hirose, Supplier Part Number 1=H125270CT-ND, ComponentLink1Description=http://www.farnell.com/datasheets/2060515.pdf, ComponentLink1URL=http://www.farnell.com/datasheets/2060515.pdf, Connector Type=USB, Contact Material=Copper, Contact Plating=Gold, Gender=Receptacle, Lead Free="Lead Free", Manufacturer Part Number=ZX62-B-5PA(33), Mating Cycles=10000, Number of Contacts=5, Orientation="Right Angle", Packaging="Tape and Reel", Pricing 1="1=0.84, 10=0.792, 25=0.7128, 50=0.6336, 100=0.6072, 250=0.5544, 500=0.528, 1000=0.4356 (USD)", REACH SVHC=Unknown, Stock 1=63782, Supplier 1=Digi-Key
J2: library part "60P 0.4mm Hirose Conn Plug", "CONN HDR 60POS 0.4MM SMD GOLD", Case/Package=SMD/SMT, Current Rating=300mA, Manufacturer=Hirose, Package Quantity=5000, Supplier Part Number 1=H11628CT-ND, Voltage Rating=30V, ComponentLink1Description=https://datasheet.ciiva.com/46408/1824826-46408908.pdf, ComponentLink1URL=https://datasheet.ciiva.com/46408/1824826-46408908.pdf, Connector Type=Plug, Contact Material=Bronze, Contact Plating=Gold, Gender=Male, Housing Material=Polymer, Lead Free="Lead Free", Manufacturer Part Number=DF40C-60DP-0.4V(51), Mount="Surface Mount", Number of Contacts=60, Number of Positions=60, Number of Rows=2, Packaging="Tape and Reel", Pitch=0.4mm, Pricing 1="1=1.24, 10=1.094, 25=1.0296, 50=0.9868, 100=0.9438, 250=0.858, 500=0.7722, 1000=0.6864, 2500=0.6221 (USD)", REACH SVHC="No SVHC", Stack Height=3.5mm, Stock 1=18849, Supplier 1=Digi-Key, Termination=SMD/SMT
L1 L2: "FERRITE BEAD 600 OHM 0402 1LN", Case/Package=0402, Case Code (Metric)=1005, Current Rating=900mA, DC Resistance (DCR)=230mR, Manufacturer=Murata, Max Operating Temperature=125°C, Min Operating Temperature=-55°C, Package Quantity=10000, Supplier Part Number 1=490-9657-1-ND, Test Frequency=100MHz, Tolerance=25%, Case Code (Imperial)=0402, ComponentLink1Description=https://datasheet.ciiva.com/41860/l0110e-41860698.pdf, ComponentLink1URL=https://datasheet.ciiva.com/41860/l0110e-41860698.pdf, ComponentLink2Description=https://datasheet.ciiva.com/41449/001172217-da-01-en-drossel-0402-600r-1-0x0-5mm-10000st-41449505.pdf, ComponentLink2URL=https://datasheet.ciiva.com/41449/001172217-da-01-en-drossel-0402-600r-1-0x0-5mm-10000st-41449505.pdf, Height=0.5mm, Impedance=600R, Lead Free="Lead Free", Length=1mm, Manufacturer Part Number=BLM15PX601SN1D, Material=Steel, Max Current Rating=900mA, Max DC Current=900mA, Number of Circuits=1, Number of Lines=1, Number of Pins=2, Packaging="Tape and Reel", Pricing 1="1=0.15, 10=0.123, 25=0.0956, 50=0.0792, 100=0.0682, 250=0.0546, 500=0.0491, 1000=0.0409, 5000=0.0382 (USD)", Stock 1=156023, Supplier 1=Digi-Key, Termination=SMD/SMT, Width=0.5mm
Q1: "MOSFET P-CH 20V 770MA 3DFN", Case/Package=DFN, Continuous Drain Current (ID)=1.17A, Drain to Source Breakdown Voltage=-20V, Drain to Source Resistance=960mR, Drain to Source Voltage (Vdss)=20V, Gate to Source Voltage (Vgs)=8V, Input Capacitance=80pF, Manufacturer=Diodes, Max Operating Temperature=150°C, Max Power Dissipation=990mW, Min Operating Temperature=-55°C, Package Quantity=1, Supplier Part Number 1=DMP21D0UFB4-7BDICT-ND, ComponentLink1Description=https://datasheet.ciiva.com/6369/dmp21d0ufb4-6369012.pdf, ComponentLink1URL=https://datasheet.ciiva.com/6369/dmp21d0ufb4-6369012.pdf, ComponentLink2Description=https://datasheet.ciiva.com/6369/dmp21d0ufb4-6369014.pdf, ComponentLink2URL=https://datasheet.ciiva.com/6369/dmp21d0ufb4-6369014.pdf, ComponentLink3Description=https://datasheet.ciiva.com/6369/dmp21d0ufb4-6369015.pdf, ComponentLink3URL=https://datasheet.ciiva.com/6369/dmp21d0ufb4-6369015.pdf, ComponentLink4Description=https://datasheet.ciiva.com/30023/dmp21d0ufb4-30023815.pdf, ComponentLink4URL=https://datasheet.ciiva.com/30023/dmp21d0ufb4-30023815.pdf, ComponentLink5Description=https://datasheet.ciiva.com/30479/0900766b8115c367-30479913.pdf, ComponentLink5URL=https://datasheet.ciiva.com/30479/0900766b8115c367-30479913.pdf, ComponentLink6Description=https://datasheet.ciiva.com/13051/dmp21d0ufb4-13051690.pdf, ComponentLink6URL=https://datasheet.ciiva.com/13051/dmp21d0ufb4-13051690.pdf, Contact Plating=Gold, Element Configuration=Single, Fall Time=18.5ns, Height=0.35mm, Lead Free="Lead Free", Length=1.05mm, Manufacturer Part Number=DMP21D0UFB4-7B, Mount="Surface Mount", Number of Channels=1, Number of Elements=1, Number of Pins=3, Packaging="Tape and Reel", Power Dissipation=990mW, Pricing 1="1=0.4, 10=0.303, 100=0.1886, 500=0.129, 1000=0.0992 (USD)", Radiation Hardening=No, Rds On Max=495mR, REACH SVHC="No SVHC", Rise Time=8ns, Stock 1=167177, Supplier 1=Digi-Key, Turn-Off Delay Time=31.7ns, Turn-On Delay Time=7.1ns, Width=0.65mm
Q2: "MOSFET 2N-CH 20V 0.6A 6DFN", Case/Package=600, Continuous Drain Current (ID)=600mA, Drain to Source Voltage (Vdss)=20V, Input Capacitance=21.3pF, Manufacturer="NXP Semiconductors", Max Operating Temperature=150°C, Max Power Dissipation=265mW, Min Operating Temperature=-55°C, Supplier Part Number 1=1727-1470-1-ND, Threshold Voltage=700mV, ComponentLink1Description=https://datasheet.ciiva.com/29589/pmdxb600une-29589931.pdf, ComponentLink1URL=https://datasheet.ciiva.com/29589/pmdxb600une-29589931.pdf, ComponentLink2Description=https://datasheet.ciiva.com/29589/pmdxb600une-29589932.pdf, ComponentLink2URL=https://datasheet.ciiva.com/29589/pmdxb600une-29589932.pdf, ComponentLink3Description=https://datasheet.ciiva.com/29589/pmdxb600une-29589933.pdf, ComponentLink3URL=https://datasheet.ciiva.com/29589/pmdxb600une-29589933.pdf, Manufacturer Part Number=PMDXB600UNE, Number of Pins=6, Packaging="Tape and Reel", Pricing 1="1=0.65, 10=0.552, 100=0.4124, 500=0.324, 1000=0.2504 (USD)", Rds On Max=620mR, REACH SVHC="No SVHC", Stock 1=27879, Supplier 1=Digi-Key
R1 R3 R4: library part "10k 0201", "RES SMD 10K OHM 1% 1/20W 0201", Case/Package=0201, Case Code (Metric)=0603, Manufacturer="Panasonic ECG", Manufacturer Part Number=ERJ-1GEF1002C, Max Operating Temperature=125°C, Max Power Dissipation=50mW, Min Operating Temperature=-55°C, Package Quantity=15000, Resistance=10KR, Supplier Part Number 1=P10.0KABCT-ND, Temperature Coefficient=200ppm/°C, Tolerance=1%, Voltage Rating=25V, Voltage Rating (DC)=15V, Case Code (Imperial)=0201, ComponentLink1Description=https://datasheet.ciiva.com/16427/erj-1gef1002c-16427252.pdf, ComponentLink1URL=https://datasheet.ciiva.com/16427/erj-1gef1002c-16427252.pdf, ComponentLink2Description=https://datasheet.ciiva.com/30111/aoa0000ce2-30111653.pdf, ComponentLink2URL=https://datasheet.ciiva.com/30111/aoa0000ce2-30111653.pdf, ComponentLink3Description=https://datasheet.ciiva.com/16775/70260683-16775527.pdf, ComponentLink3URL=https://datasheet.ciiva.com/16775/70260683-16775527.pdf, ComponentLink4Description=https://datasheet.ciiva.com/22785/1678796-22785991.pdf, ComponentLink4URL=https://datasheet.ciiva.com/22785/1678796-22785991.pdf, ComponentLink5Description=https://datasheet.ciiva.com/7830/1678796-7830952.pdf, ComponentLink5URL=https://datasheet.ciiva.com/7830/1678796-7830952.pdf, ComponentLink6Description=https://datasheet.ciiva.com/16770/70260683-16770095.pdf, ComponentLink6URL=https://datasheet.ciiva.com/16770/70260683-16770095.pdf, Composition="Thick Film", Contact Plating=Tin, Depth=0.3mm, Height=0.23mm, Lead Free="Lead Free", Length=0.6mm, Military Standard=Not, Mount="Surface Mount", Number of Terminations=2, Packaging="Tape and Reel", Power Rating=50mW, Pricing 1="1=0.1, 10=0.059, 100=0.024, 1000=0.0108, 2500=0.0094, 5000=0.0077 (USD)", Radiation Hardening=No, REACH SVHC=Unknown, Stock 1=4709989, Supplier 1=Digi-Key, Termination=SMD/SMT, Width=0.012inch
R2 R10 R12: library part "100k 0201", "RES SMD 100K OHM 1% 1/20W 0201", Case/Package=0201, Case Code (Metric)=0603, Manufacturer="Panasonic ECG", Manufacturer Part Number=ERJ-1GEF1003C, Max Operating Temperature=125°C, Max Power Dissipation=50mW, Min Operating Temperature=-55°C, Package Quantity=1, Resistance=100KR, Supplier Part Number 1=P100KABCT-ND, Temperature Coefficient=200ppm/°C, Tolerance=1%, Voltage Rating=25V, Voltage Rating (DC)=15V, Case Code (Imperial)=0201, ComponentLink1Description=https://datasheet.ciiva.com/2439/erj-g-r-e-rev08-2439265.pdf, ComponentLink1URL=https://datasheet.ciiva.com/2439/erj-g-r-e-rev08-2439265.pdf, ComponentLink2Description=https://datasheet.ciiva.com/2439/erj-g-r-e-rev08-2439266.pdf, ComponentLink2URL=https://datasheet.ciiva.com/2439/erj-g-r-e-rev08-2439266.pdf, ComponentLink3Description=https://datasheet.ciiva.com/2439/erj-g-r-e-rev08-2439267.pdf, ComponentLink3URL=https://datasheet.ciiva.com/2439/erj-g-r-e-rev08-2439267.pdf, ComponentLink4Description=https://datasheet.ciiva.com/7830/1678796-7830953.pdf, ComponentLink4URL=https://datasheet.ciiva.com/7830/1678796-7830953.pdf, ComponentLink5Description=https://datasheet.ciiva.com/16205/erj-1gef1003c-16205689.pdf, ComponentLink5URL=https://datasheet.ciiva.com/16205/erj-1gef1003c-16205689.pdf, ComponentLink6Description=https://datasheet.ciiva.com/16782/70260683-16782969.pdf, ComponentLink6URL=https://datasheet.ciiva.com/16782/70260683-16782969.pdf, ComponentLink7Description=https://datasheet.ciiva.com/28514/1694929-28514010.pdf, ComponentLink7URL=https://datasheet.ciiva.com/28514/1694929-28514010.pdf, ComponentLink8Description=https://datasheet.ciiva.com/30087/aoa0000ce2-30087131.pdf, ComponentLink8URL=https://datasheet.ciiva.com/30087/aoa0000ce2-30087131.pdf, Composition="Thick Film", Contact Plating=Tin, Depth=0.3mm, Height=0.01inch, Lead Free="Lead Free", Length=0.6mm, Military Standard=Not, Mount="Surface Mount", Number of Terminations=2, Packaging="Tape and Reel", Power Rating=50mW, Pricing 1="1=0.1, 10=0.059, 100=0.024, 1000=0.0108, 2500=0.0094, 5000=0.0077 (USD)", Radiation Hardening=No, REACH SVHC=Unknown, Stock 1=4025669, Supplier 1=Digi-Key, Termination=SMD/SMT, Width=0.012inch
R5 R9: library part "1k 0201", "RES SMD 1K OHM 1% 1/20W 0201", Case/Package=0201, Case Code (Metric)=0603, Manufacturer="Panasonic ECG", Manufacturer Part Number=ERJ-1GEF1001C, Max Operating Temperature=125°C, Max Power Dissipation=50mW, Min Operating Temperature=-55°C, Package Quantity=15000, Resistance=1KR, Supplier Part Number 1=P1.00KABCT-ND, Temperature Coefficient=200ppm/°C, Tolerance=1%, Voltage Rating=25V, Voltage Rating (DC)=15V, Case Code (Imperial)=0201, ComponentLink1Description=https://datasheet.ciiva.com/28532/1694929-28532042.pdf, ComponentLink1URL=https://datasheet.ciiva.com/28532/1694929-28532042.pdf, ComponentLink2Description=https://datasheet.ciiva.com/16763/70260683-16763516.pdf, ComponentLink2URL=https://datasheet.ciiva.com/16763/70260683-16763516.pdf, ComponentLink3Description=https://datasheet.ciiva.com/16199/erj-1gef1001c-16199565.pdf, ComponentLink3URL=https://datasheet.ciiva.com/16199/erj-1gef1001c-16199565.pdf, ComponentLink4Description=https://datasheet.ciiva.com/30155/aoa0000ce2-30155870.pdf, ComponentLink4URL=https://datasheet.ciiva.com/30155/aoa0000ce2-30155870.pdf, ComponentLink5Description=https://datasheet.ciiva.com/7942/1678796-7942463.pdf, ComponentLink5URL=https://datasheet.ciiva.com/7942/1678796-7942463.pdf, ComponentLink6Description=https://datasheet.ciiva.com/16782/70260683-16782463.pdf, ComponentLink6URL=https://datasheet.ciiva.com/16782/70260683-16782463.pdf, Composition="Thick Film", Contact Plating=Tin, Depth=0.3mm, Height=0.23mm, Lead Free="Lead Free", Length=0.6mm, Military Standard=Not, Mount="Surface Mount", Number of Terminations=2, Packaging="Tape and Reel", Power Rating=50mW, Pricing 1="1=0.1, 10=0.059, 100=0.024, 1000=0.0108, 2500=0.0094, 5000=0.0077 (USD)", Radiation Hardening=No, REACH SVHC=Unknown, Stock 1=3138057, Supplier 1=Digi-Key, Termination=SMD/SMT, Width=0.012inch
R6 R7: library part "27R 0201", "RES SMD 27 OHM 1% 1/20W 0201", Case/Package=0201, Case Code (Metric)=0603, Manufacturer="Panasonic ECG", Manufacturer Part Number=ERJ-1GEF27R0C, Max Operating Temperature=125°C, Max Power Dissipation=50mW, Min Operating Temperature=-55°C, Package Quantity=1, Resistance=27R, Supplier Part Number 1=P27.0ABCT-ND, Temperature Coefficient=200ppm/°C, Tolerance=1%, Voltage Rating=25V, Voltage Rating (DC)=15V, Case Code (Imperial)=0201, ComponentLink1Description=https://datasheet.ciiva.com/2526/erj-g-r-e-rev08-2526739.pdf, ComponentLink1URL=https://datasheet.ciiva.com/2526/erj-g-r-e-rev08-2526739.pdf, ComponentLink2Description=https://datasheet.ciiva.com/2526/erj-g-r-e-rev08-2526740.pdf, ComponentLink2URL=https://datasheet.ciiva.com/2526/erj-g-r-e-rev08-2526740.pdf, ComponentLink3Description=https://datasheet.ciiva.com/2526/erj-g-r-e-rev08-2526741.pdf, ComponentLink3URL=https://datasheet.ciiva.com/2526/erj-g-r-e-rev08-2526741.pdf, ComponentLink4Description=https://datasheet.ciiva.com/30072/aoa0000ce2-30072301.pdf, ComponentLink4URL=https://datasheet.ciiva.com/30072/aoa0000ce2-30072301.pdf, Composition="Thick Film", Contact Plating=Tin, Depth=0.3mm, Height=0.01inch, Lead Free="Lead Free", Length=0.6mm, Military Standard=Not, Mount="Surface Mount", Number of Terminations=2, Packaging="Tape and Reel", Power Rating=50mW, Pricing 1="1=0.1, 10=0.059, 100=0.024, 1000=0.0108, 2500=0.0094, 5000=0.0077 (USD)", Radiation Hardening=No, Stock 1=66085, Supplier 1=Digi-Key, Width=0.012inch
R8: library part "560R 0201", "RES SMD 560 OHM 1% 1/20W 0201", Case/Package=0201, Case Code (Metric)=0603, Manufacturer="Panasonic ECG", Manufacturer Part Number=ERJ-1GEF5600C, Max Operating Temperature=125°C, Max Power Dissipation=50mW, Min Operating Temperature=-55°C, Package Quantity=15000, Supplier Part Number 1=P560ABCT-ND, Temperature Coefficient=200ppm/°C, Tolerance=1%, Voltage Rating=25V, Voltage Rating (DC)=15V, Case Code (Imperial)=0201, ComponentLink1Description=https://datasheet.ciiva.com/2440/erj-g-r-e-rev08-2440588.pdf, ComponentLink1URL=https://datasheet.ciiva.com/2440/erj-g-r-e-rev08-2440588.pdf, ComponentLink2Description=https://datasheet.ciiva.com/2440/erj-g-r-e-rev08-2440589.pdf, ComponentLink2URL=https://datasheet.ciiva.com/2440/erj-g-r-e-rev08-2440589.pdf, ComponentLink3Description=https://datasheet.ciiva.com/2440/erj-g-r-e-rev08-2440590.pdf, ComponentLink3URL=https://datasheet.ciiva.com/2440/erj-g-r-e-rev08-2440590.pdf, Composition="Thick Film", Contact Plating=Tin, Depth=0.3mm, Height=0.01inch, Lead Free="Lead Free", Length=0.6mm, Military Standard=Not, Mount="Surface Mount", Number of Terminations=2, Packaging="Tape and Reel", Power Rating=50mW, Pricing 1="1=0.1, 10=0.059, 100=0.024, 1000=0.0108, 2500=0.0094, 5000=0.0077 (USD)", Radiation Hardening=No, Resistance=560R, Stock 1=11988, Supplier 1=Digi-Key, Width=0.3mm
R11: library part "523k 0201", "RES SMD 523K OHM 1% 1/20W 0201", Case/Package=0201, Case Code (Metric)=0603, Manufacturer="Panasonic ECG", Manufacturer Part Number=ERJ-1GEF5233C, Max Operating Temperature=125°C, Max Power Dissipation=50mW, Min Operating Temperature=-55°C, Package Quantity=1, Resistance=523KR, Supplier Part Number 1=P523KABCT-ND, Temperature Coefficient=200ppm/°C, Tolerance=1%, Voltage Rating=25V, Voltage Rating (DC)=15V, Case Code (Imperial)=0201, ComponentLink1Description=https://datasheet.ciiva.com/2440/erj-g-r-e-rev08-2440225.pdf, ComponentLink1URL=https://datasheet.ciiva.com/2440/erj-g-r-e-rev08-2440225.pdf, ComponentLink2Description=https://datasheet.ciiva.com/2440/erj-g-r-e-rev08-2440226.pdf, ComponentLink2URL=https://datasheet.ciiva.com/2440/erj-g-r-e-rev08-2440226.pdf, ComponentLink3Description=https://datasheet.ciiva.com/2440/erj-g-r-e-rev08-2440227.pdf, ComponentLink3URL=https://datasheet.ciiva.com/2440/erj-g-r-e-rev08-2440227.pdf, Composition="Thick Film", Contact Plating=Tin, Height=0.01inch, Lead Free="Lead Free", Length=0.024inch, Mount="Surface Mount", Number of Terminations=2, Packaging="Tape and Reel", Power Rating=50mW, Pricing 1="1=0.1, 10=0.059, 100=0.024, 1000=0.0108, 2500=0.0094, 5000=0.0077 (USD)", Stock 1=42844, Supplier 1=Digi-Key, Width=0.012inch
TP1 TP2: "0.5mm SMT Test Point"
U1: "IC MCU 8BIT 64KB FLASH 49VFBGA", Frequency=32MHz, Manufacturer="Microchip / Atmel", Manufacturer Part Number=ATXMEGA64A4U-CUR, Max Operating Temperature=85°C, Max Supply Voltage=3.6V, Min Operating Temperature=-40°C, Min Supply Voltage=1.6V, Package Quantity=2000, Supplier Part Number 1=ATXMEGA64A4U-CURCT-ND, ComponentLink1Description=https://datasheet.ciiva.com/24017/atmel-8387-8-and16-bit-avr-microcontroller-xmega-a-259135-24017304.pdf, ComponentLink1URL=https://datasheet.ciiva.com/24017/atmel-8387-8-and16-bit-avr-microcontroller-xmega-a-259135-24017304.pdf, Data Bus Width=8b, Interface=I2C,SPI,USB,IrDA,UART,USART, Max Frequency=32MHz, Memory Size=64KB, Memory Type=FLASH, Mount="Surface Mount", Number of Programmable I/O=34, Number of Timers/Counters=5, Oscillator Type=Internal, Packaging="Tape and Reel", Peripherals="Brown-out Detect/Reset,POR,PWM,WDT,DMA", Pricing 1="1=4.65, 25=4.2632, 100=3.864 (USD)", RAM Size=4KB, Stock 1=4285, Supplier 1=Digi-Key, Watchdog Timer=Yes
U2: "BGM123 BLUETOOTH SIP MODULE, 3 D", Manufacturer="Silicon Labs", Supplier Part Number 1=336-3808-1-ND, Manufacturer Part Number=BGM123A256V2R, Stock 1=0, Supplier 1=Digi-Key